# Altium PCB SensorHub.PcbDoc
Units mm, origin at the board's own origin, x right, y up, seen from the top; angles counter-clockwise.
Board outline 51.44 x 47.88 mm, 4 copper layers (Top Layer, Layer 1, Layer 2, Bottom Layer), stack 1.782 mm thick; 53 components, 43 nets, 250 pads, 74 vias.
Unrouted connection lines stored in the file: 83.
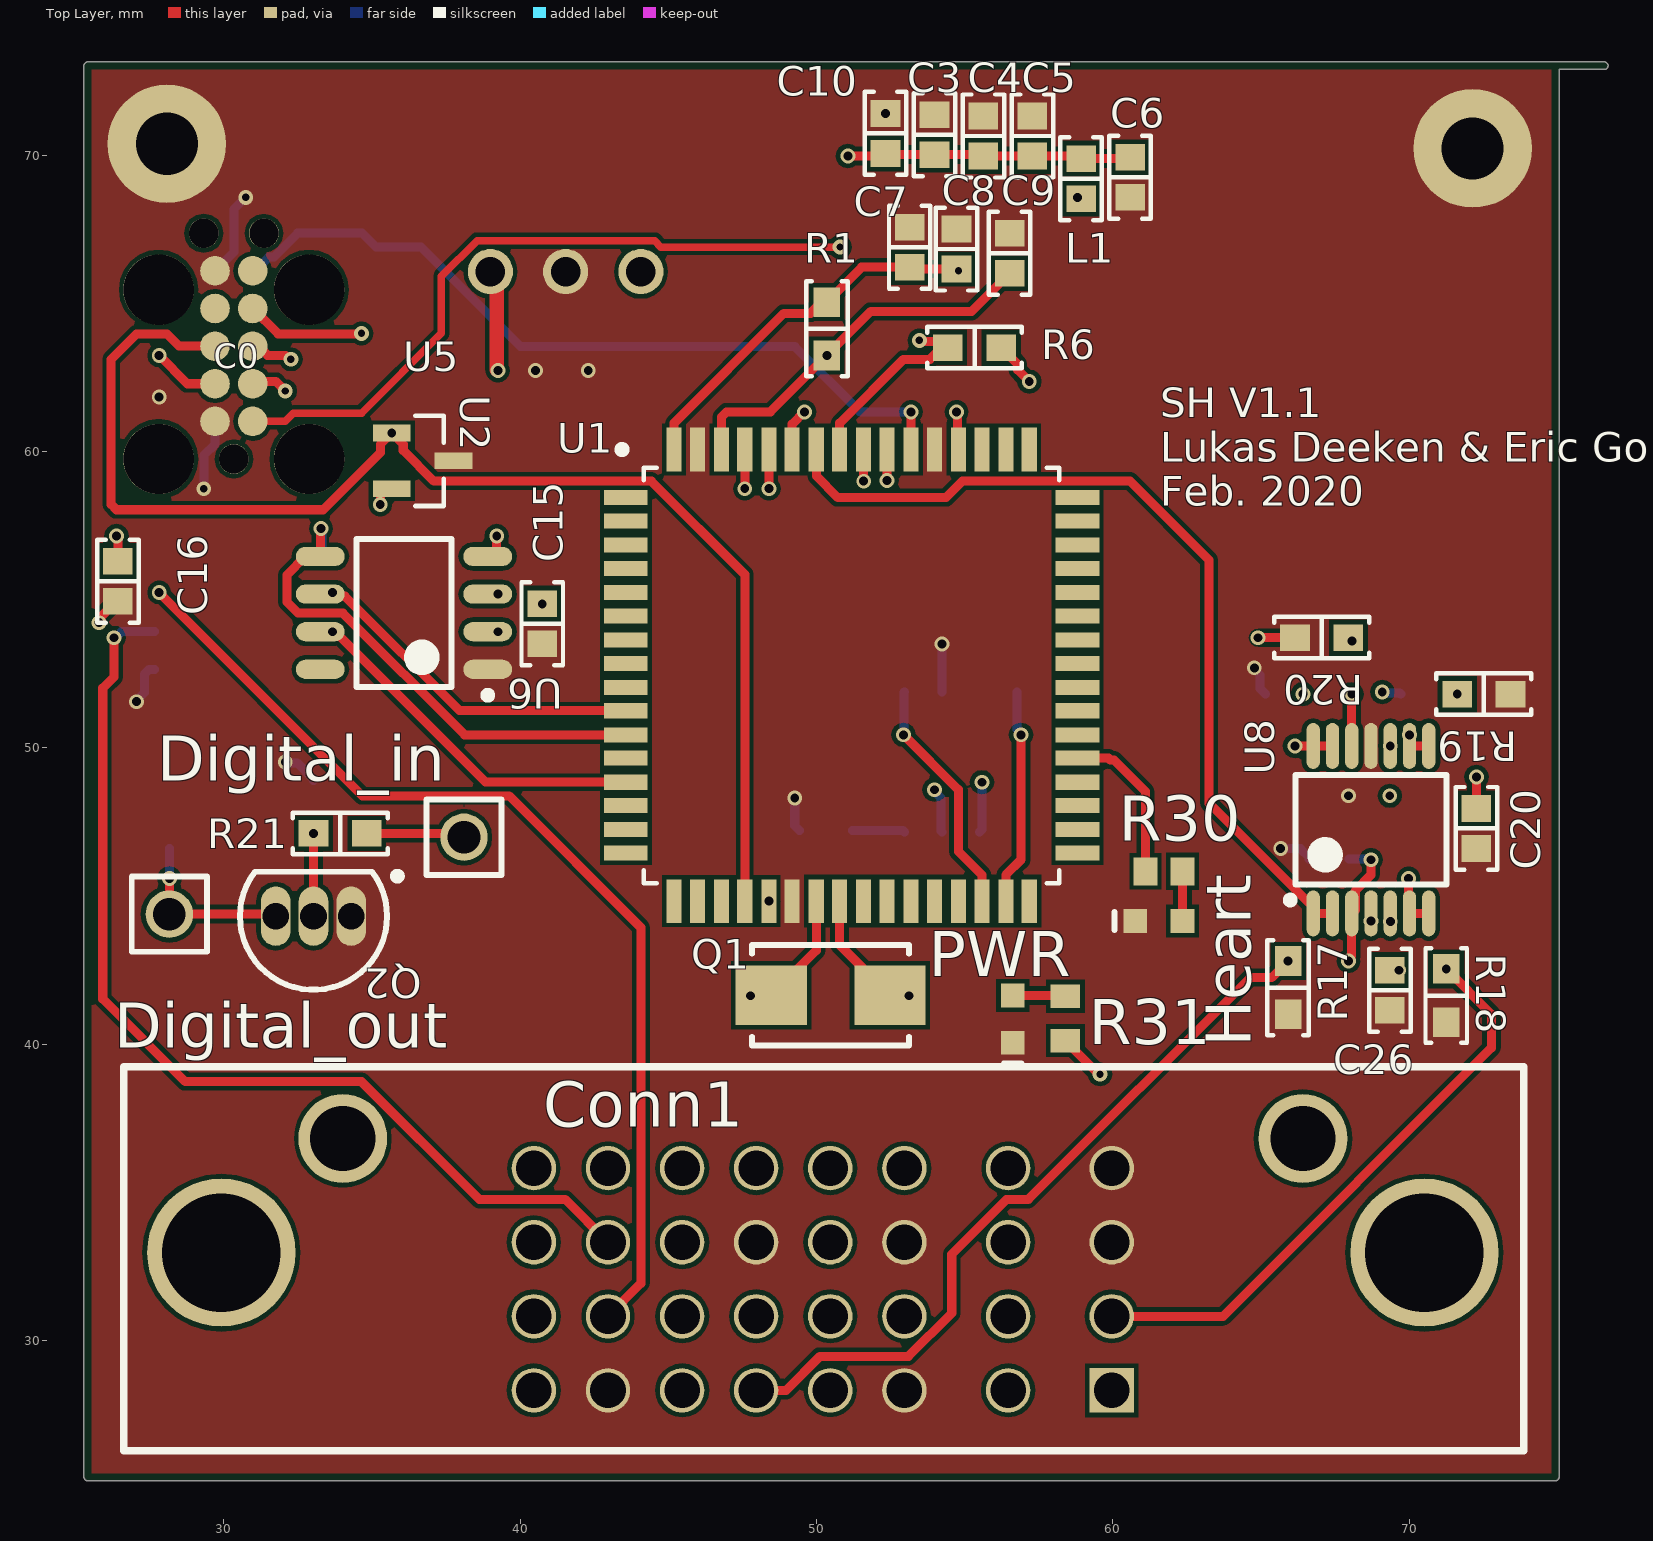
[diagram p0: Top Layer view]
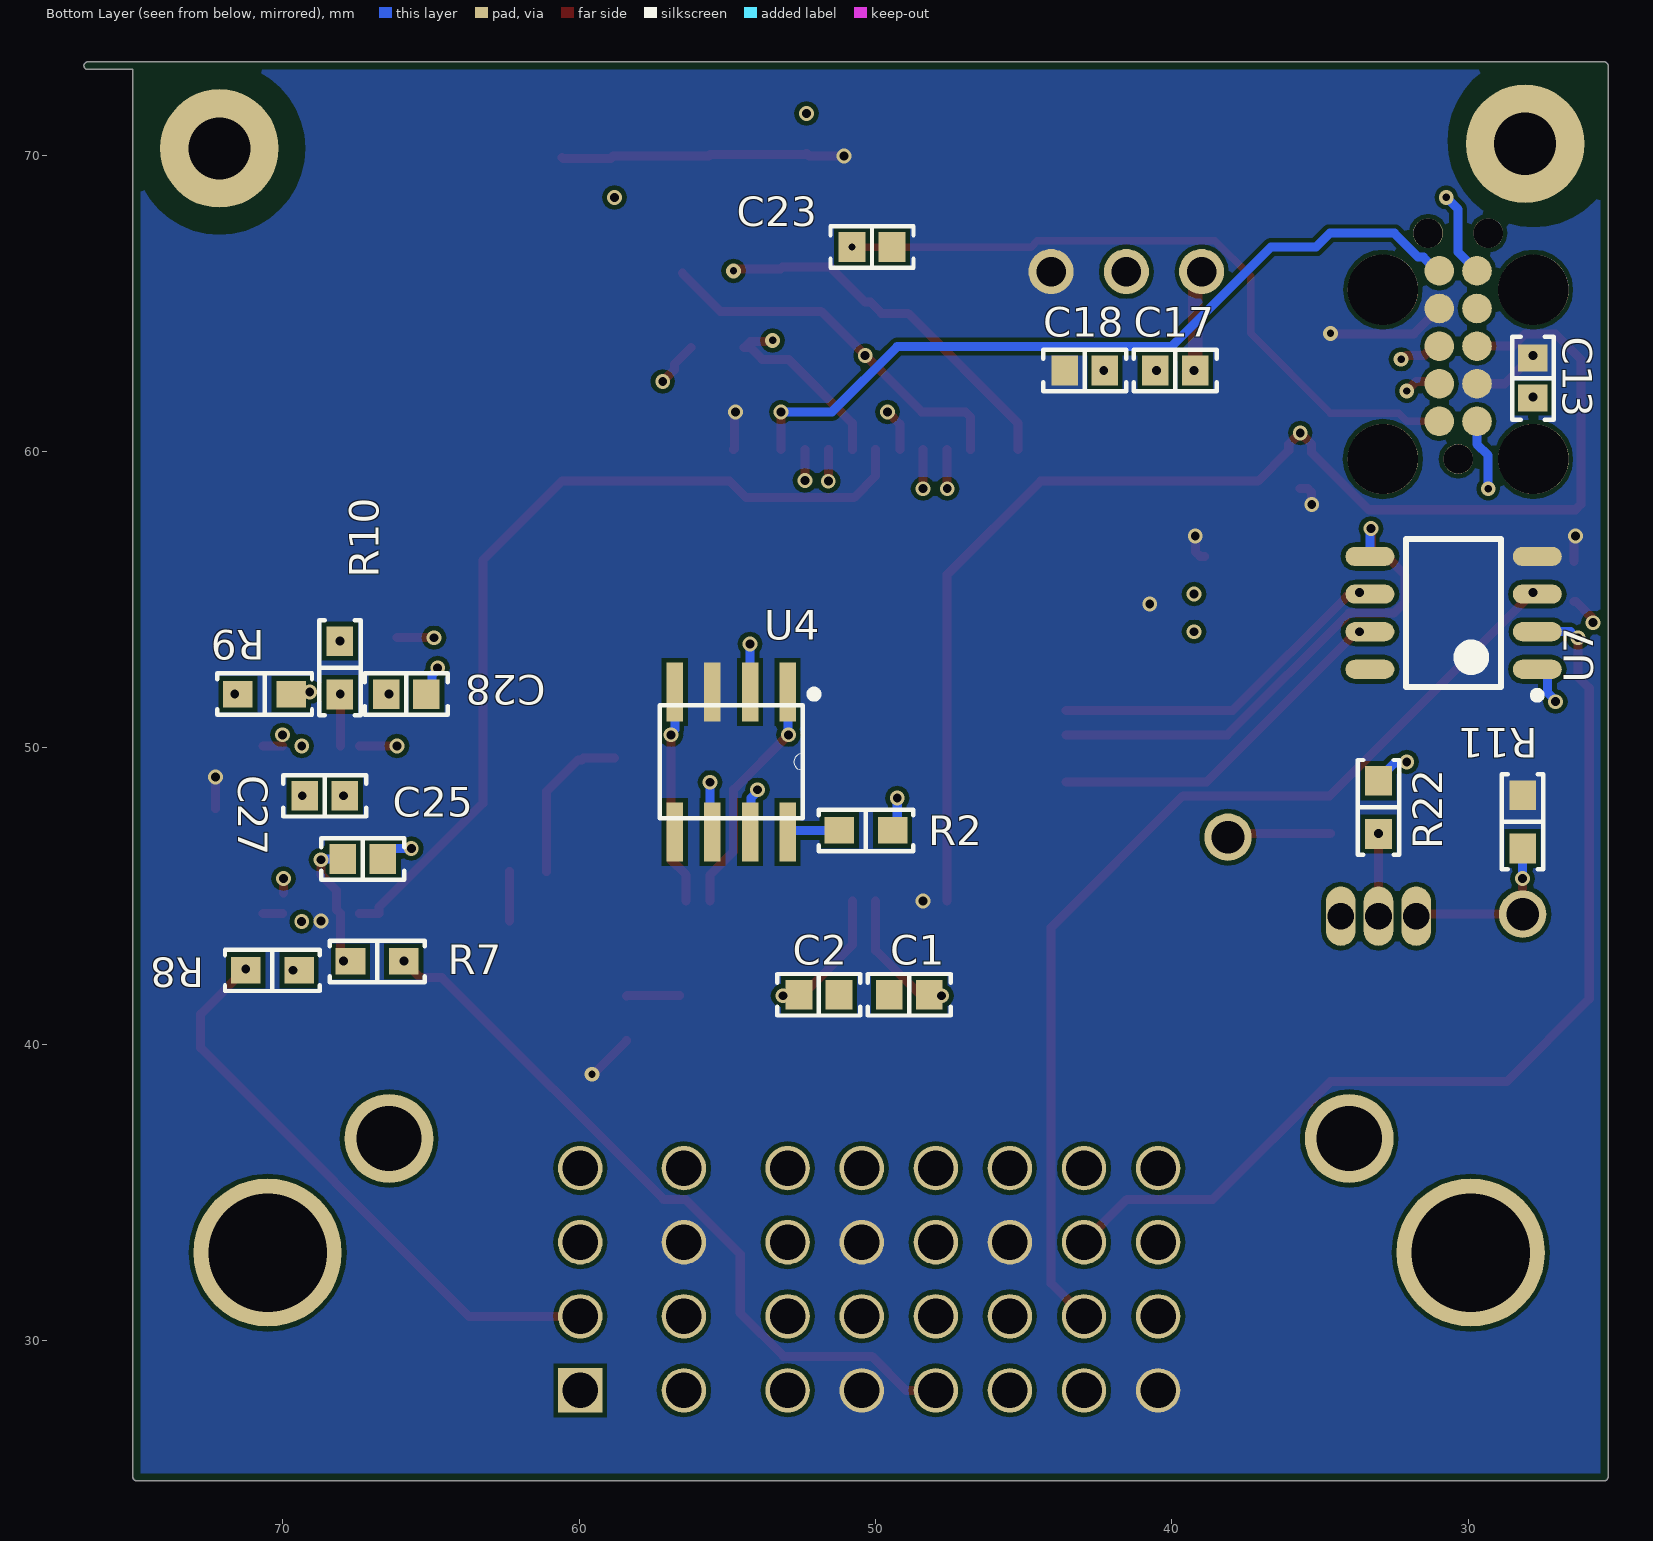
[diagram p1: Bottom Layer view, seen from below]
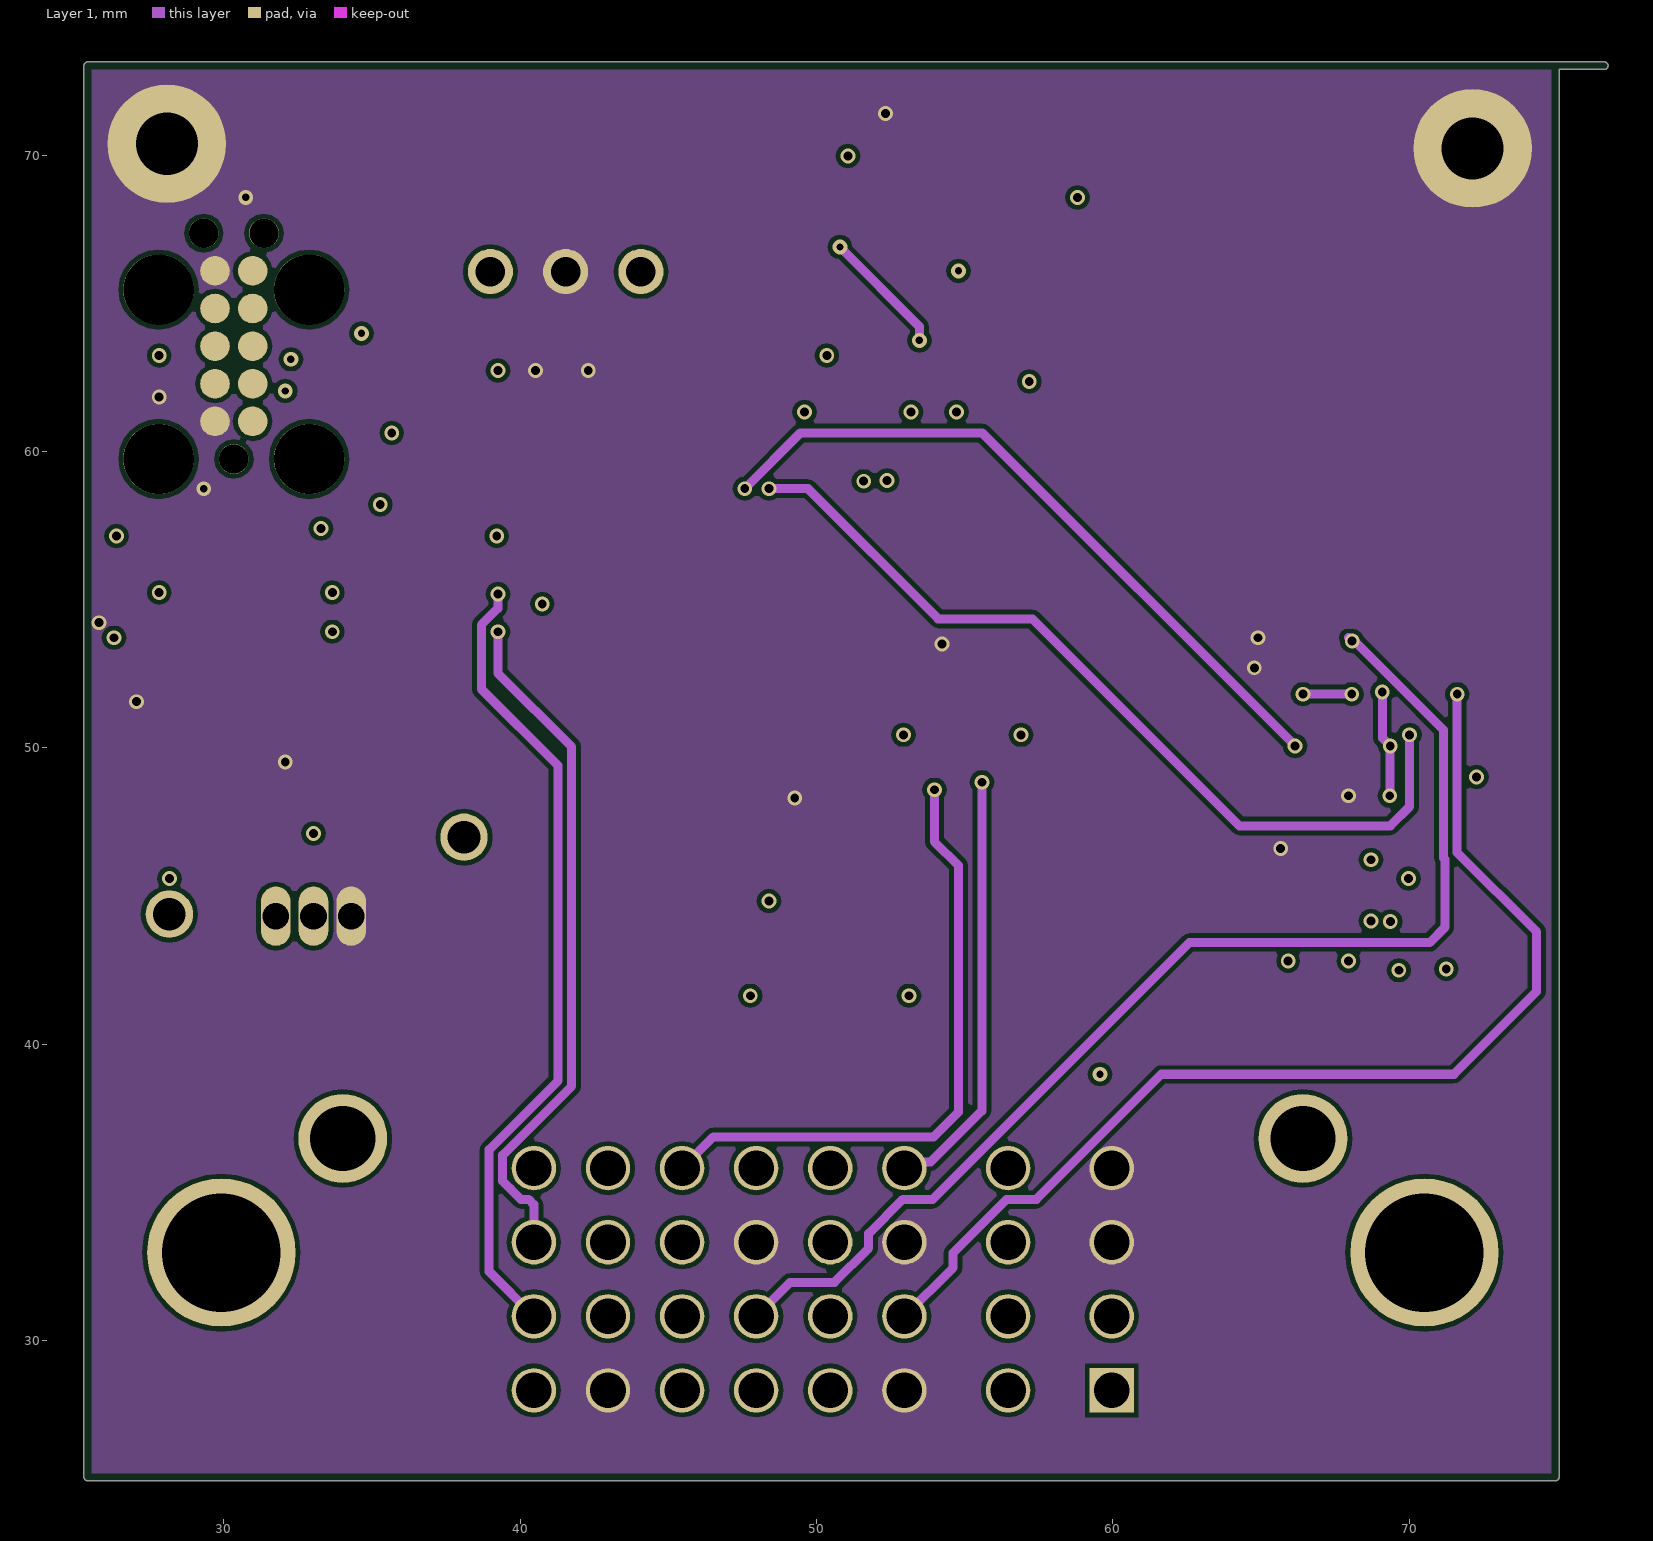
[diagram p2: Layer 1]
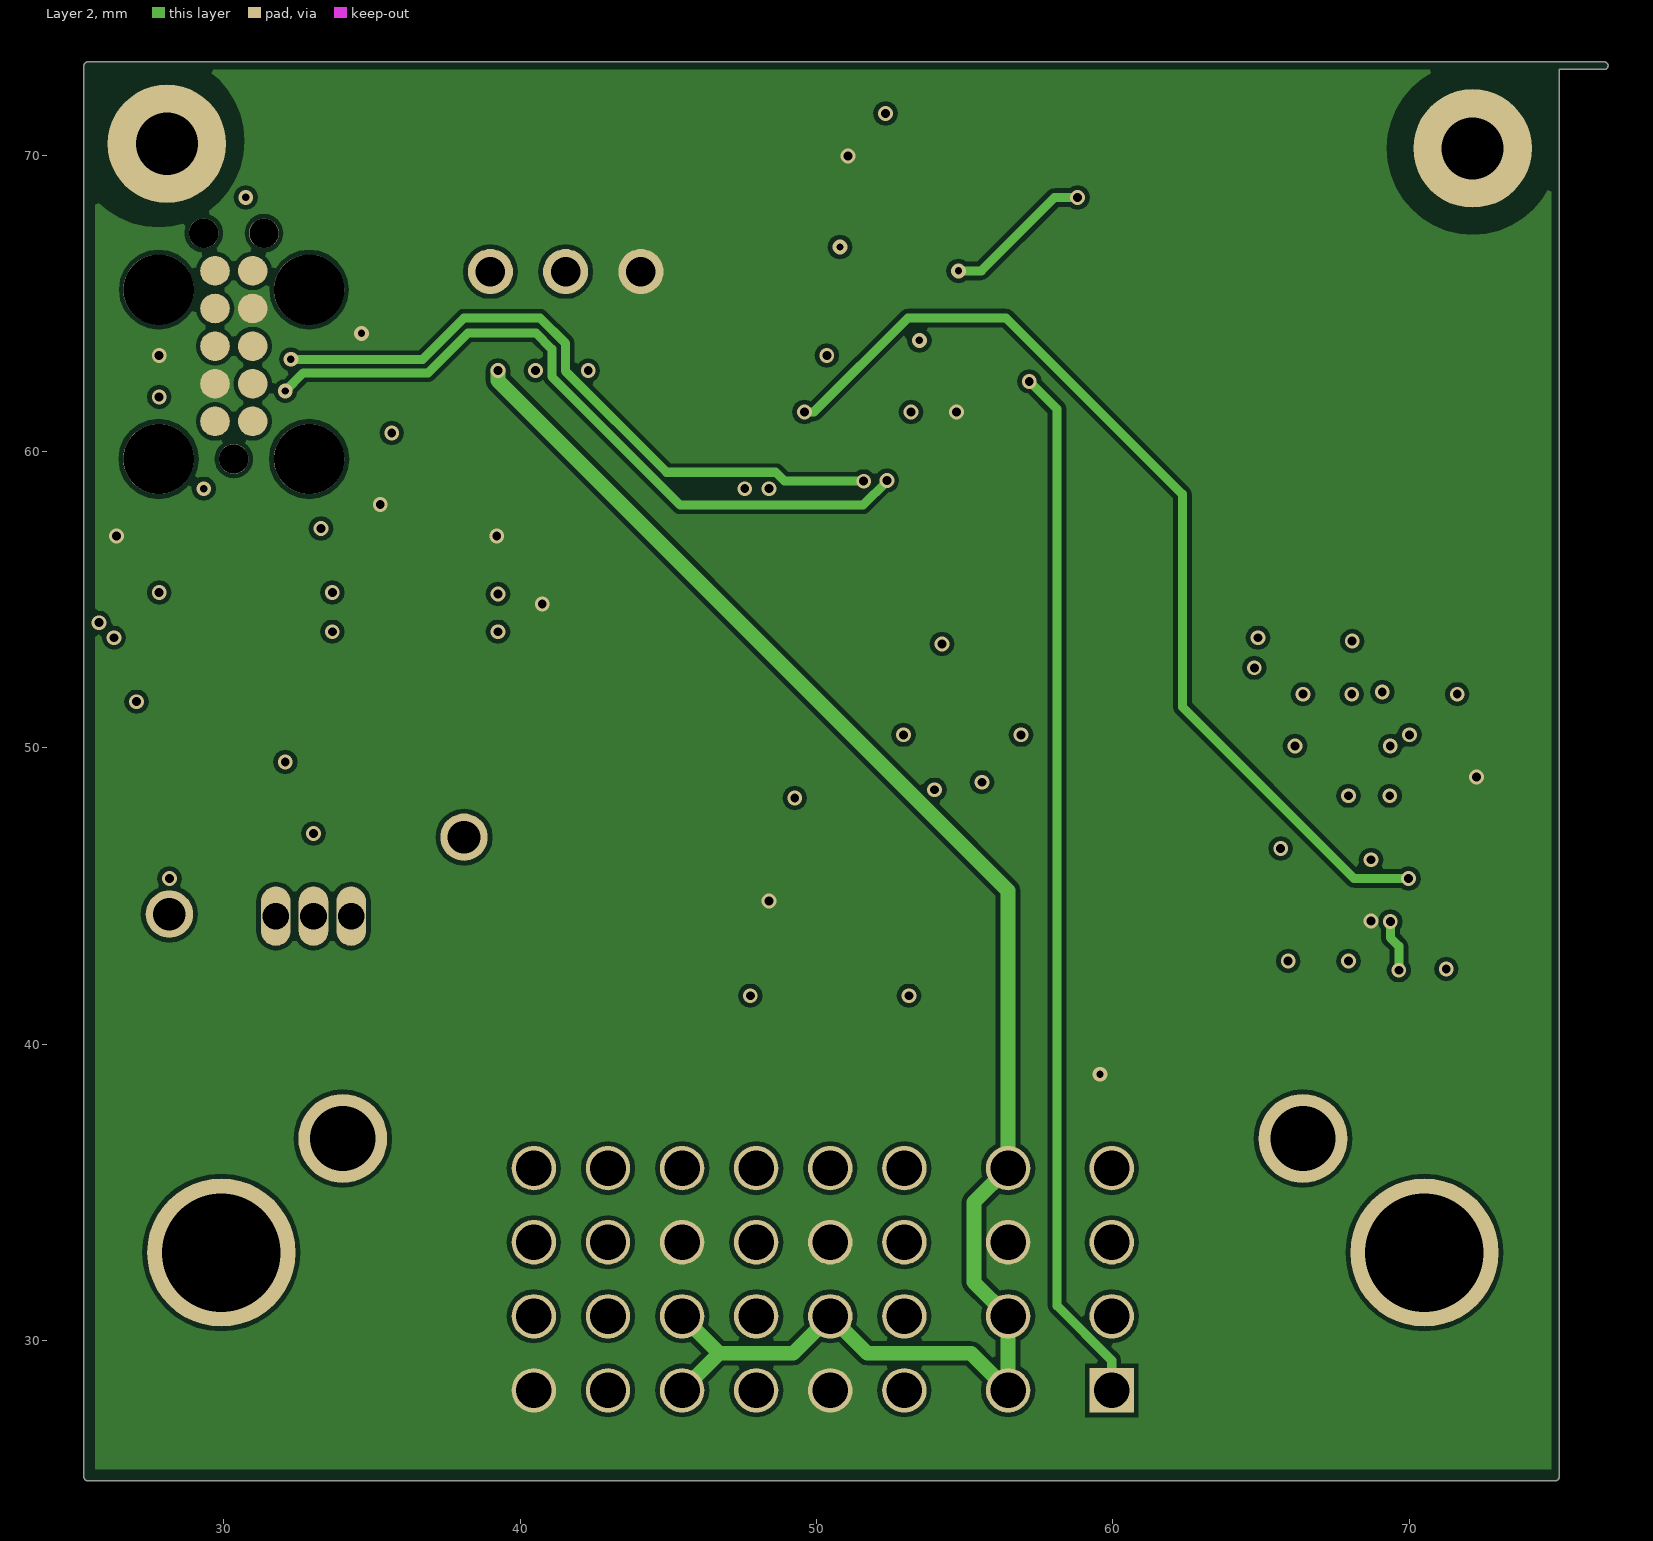
[diagram p3: Layer 2]
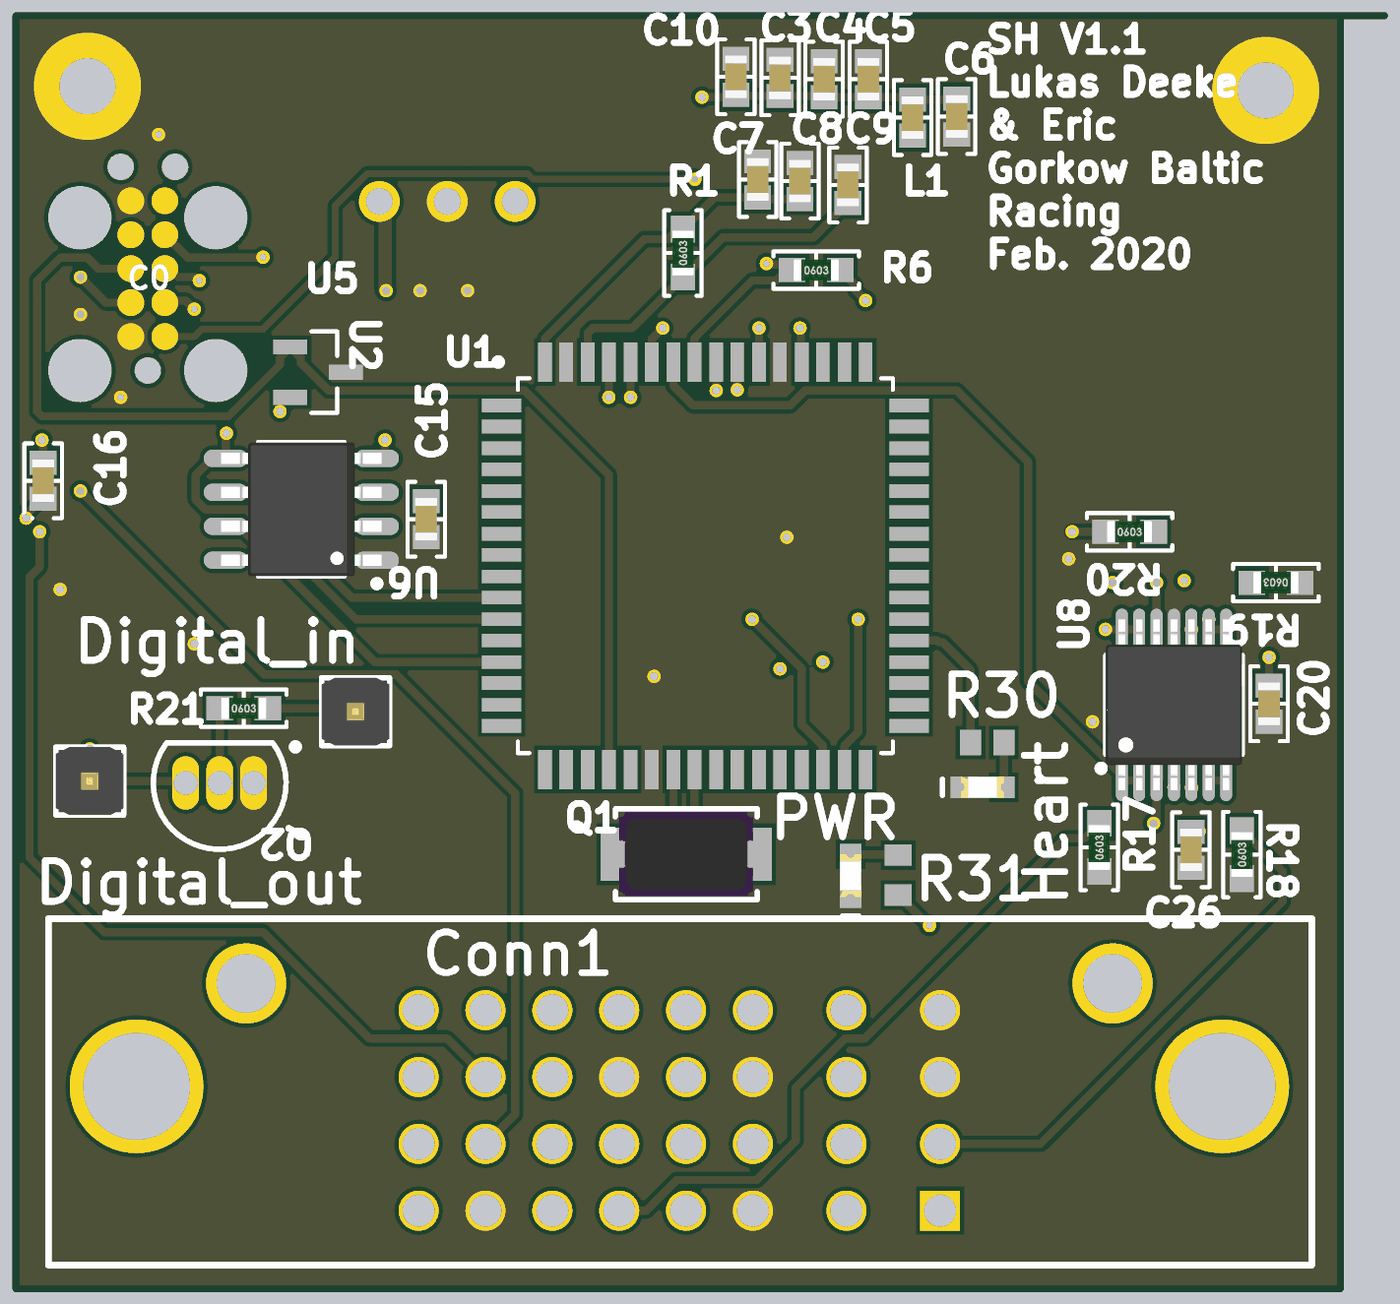
[diagram p4: 3D render of the assembled board from above, using the file's embedded part models]
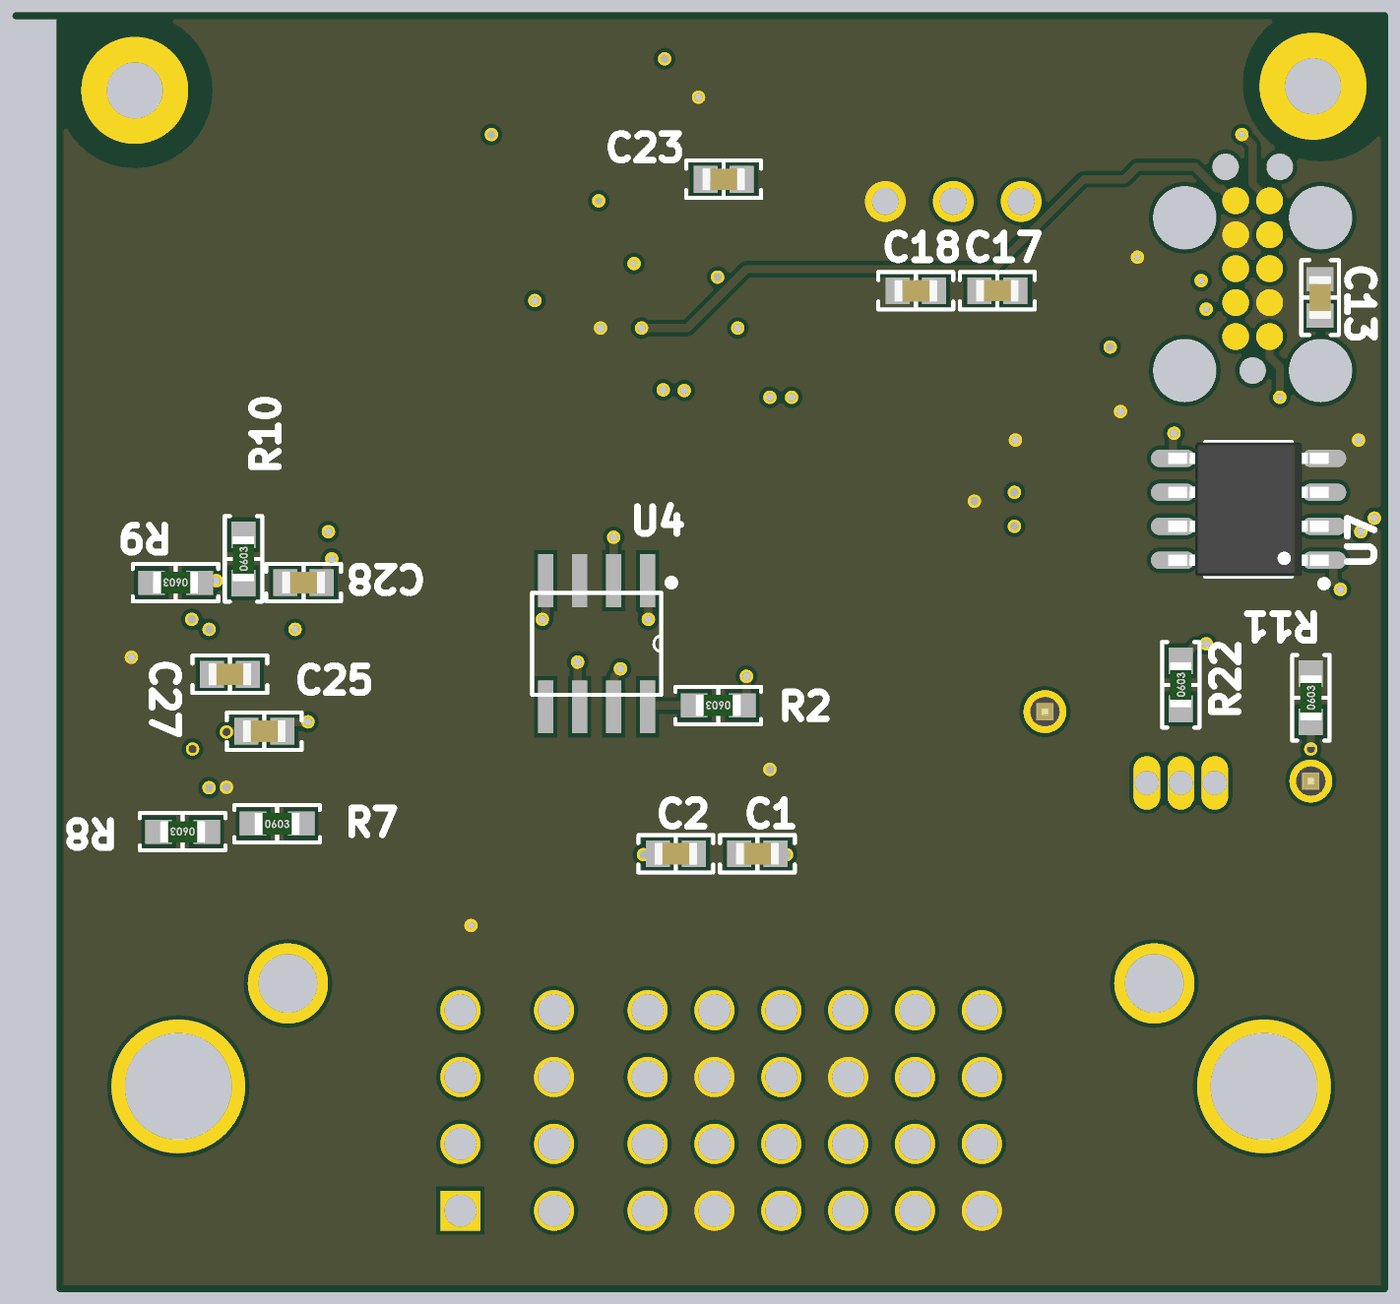
[diagram p5: 3D render of the assembled board from below, using the file's embedded part models]

## Layer stack, top to bottom
Top Solder: solder mask 0.015, Solder Resist, Dk 3.5
Top Layer: signal copper 0.035
Dielectric 2: prepreg 0.0711, PP-006, Dk 4.1
Layer 1: signal copper 0.035
Dielectric 1: dielectric 1.5, FR-4, Dk 4.8
Layer 2: signal copper 0.035
Dielectric 3: prepreg 0.0711, PP-006, Dk 4.1
Bottom Layer: signal copper 0.035
Bottom Solder: solder mask 0.015, Solder Resist, Dk 3.5

## Board outline
25.4,25.273 cw(c25.4,25.4) 25.273,25.4 25.273,73.025 cw(c25.4,73.025) 25.4,73.152 76.581,73.152 cw(c76.581,73.025) 76.708,73.025 cw(c76.581,73.025) 76.581,72.898 75.057,72.898 75.057,25.4 cw(c74.93,25.4) 74.93,25.273

## Design rules (kind name [scope] priority, off if disabled: settings)
AcuteAngle [All] p1: minimum=4.50000000000000E+0001 checktracksonly=FALSE
BoardOutlineClearance [All] p1: gap=0.254 ignorepadtopadclearanceinfootprint=FALSE
Clearance [All] p1: gap=0.152 ignorepadtopadclearanceinfootprint=FALSE
ComponentClearance [All] p1: gap=0.1 collisioncheckmode=3 verticalgap=0.254 showdistances=FALSE
FanoutControl Fanout_Small [All] p1 off: bgadir=Out bgaviamode=Centered fanoutstyle=Auto fanoutdirection=Alternating viagrid=0.025 // Protel DXP Scope 1 Expression Was: (CompPinCount < 5)   Fanout_Small (Default Rule)
FanoutControl Fanout_Default [All] p2: bgadir=Out bgaviamode=Centered fanoutstyle=Auto fanoutdirection=Alternating viagrid=0.025 // Fanout_Default (Default Rule)
FanoutControl Fanout_SOIC [All] p3 off: bgadir=Out bgaviamode=Centered fanoutstyle=Auto fanoutdirection=Alternating viagrid=0.025 // Protel DXP Scope 1 Expression Was: IsSOIC   Fanout_SOIC (Default Rule)
FanoutControl Fanout_BGA [All] p4 off: bgadir=Out bgaviamode=Centered fanoutstyle=Auto fanoutdirection=Alternating viagrid=0.025 // Protel DXP Scope 1 Expression Was: IsBGA   Fanout_BGA (Default Rule)
FanoutControl Fanout_LCC [All] p5 off: bgadir=Out bgaviamode=Centered fanoutstyle=Auto fanoutdirection=Alternating viagrid=0.025 // Protel DXP Scope 1 Expression Was: IsLCC   Fanout_LCC (Default Rule)
HoleSize [All] p1: absolutevalues=TRUE maxlimit=7 minlimit=0.2 maxpercent=80.000 minpercent=20.000
MinimumAnnularRing [All] p1: minimumring=0.17
PolygonConnect PolygonConnect_8 [All vs IsNamedPolygon('+5V_L04_P004')] p1: connectstyle=Direct reliefconductorwidth=0.254 reliefentries=4 polygonreliefangle="90 Angle" airgapwidth=0.254
PolygonConnect PolygonConnect_7 [All vs IsNamedPolygon('+5V_L03_P011')] p2: connectstyle=Direct reliefconductorwidth=0.254 reliefentries=4 polygonreliefangle="90 Angle" airgapwidth=0.254
PolygonConnect PolygonConnect_6 [All vs IsNamedPolygon('GND_L02_P008')] p3: connectstyle=Direct reliefconductorwidth=0.254 reliefentries=4 polygonreliefangle="90 Angle" airgapwidth=0.254
PolygonConnect PolygonConnect_5 [All vs IsNamedPolygon('GND_L01_P009')] p4: connectstyle=Direct reliefconductorwidth=0.254 reliefentries=4 polygonreliefangle="90 Angle" airgapwidth=0.254
PolygonConnect PolygonConnect_4 [All vs IsNamedPolygon('+5V_L04_P004')] p5: connectstyle=Direct reliefconductorwidth=0.254 reliefentries=4 polygonreliefangle="90 Angle" airgapwidth=0.254
PolygonConnect PolygonConnect_3 [All vs IsNamedPolygon('+5V_L03_P003')] p6: connectstyle=Direct reliefconductorwidth=0.254 reliefentries=4 polygonreliefangle="90 Angle" airgapwidth=0.254
PolygonConnect PolygonConnect_2 [All vs IsNamedPolygon('GND_L02_P002')] p7: connectstyle=Direct reliefconductorwidth=0.254 reliefentries=4 polygonreliefangle="90 Angle" airgapwidth=0.254
PolygonConnect PolygonConnect_1 [All vs IsNamedPolygon('GND_L01_P000')] p8: connectstyle=Direct reliefconductorwidth=0.254 reliefentries=4 polygonreliefangle="90 Angle" airgapwidth=0.254
PolygonConnect [All] p9: connectstyle=Relief reliefconductorwidth=0.254 reliefentries=4 polygonreliefangle="90 Angle" airgapwidth=0.254
RoutingVias [All] p1: holewidth=0.3 width=0.64 viastyle="Through Hole" minholewidth=0.3 minwidth=0.61 maxholewidth=0.711 maxwidth=1.27
SMDEntry [All] p1 off: side=TRUE corner=TRUE anyangle=FALSE // Protel DXP Scope 1 Expression Was: not IsRoundPad
SMDToCorner [All] p1: distance=60000
SilkToSolderMaskClearance [All] p1 off: minsilkscreentomaskgap=0.254 clearancetoexposedcopper=TRUE // Protel DXP Scope 1 Expression Was: IsPad
SolderMaskExpansion [All] p1: expansion=0 istentingtop=FALSE
Width [All] p1: maxlimit=1.219 minlimit=0.152 preferedwidth=0.305
22 further rules are at their usual default settings.

## Classes and differential pairs
component class main: C0 C1 C2 C3 C4 C5 C6 C7 C8 C9 C10 C13 C15 C16 C17 C18 Conn1 Digital_in Digital_out Heart L1 PWR Q1 Q2 R1 R2 R11 R21 R22 R30 R31 U1 U2 U4 U5 U6 U7
component class "analog filterung": C20 C23 C25 C26 C27 C28 R6 R7 R8 R9 R10 R17 R18 R19 R20 U8

## Components (designator, comment, footprint, x,y, rotation, side; value= is the part's Value field where it differs from the comment)
C0 "Segger 10Pin needle HEader" "JTAG Needle Header" 30.333,59.751 r90 top
C1 "SMD Capacitor" "CAP 0603/1608" 48.854,41.672 r180 bottom value=18pF
C2 "SMD Capacitor" "CAP 0603/1608" 51.904,41.672 r0 bottom value=18pF
C3 "SMD Capacitor" "CAP 0603/1608" 53.975,70.699 r270 top value=1uF
C4 "SMD Capacitor" "CAP 0603/1608" 55.626,70.652 r270 top value=100nF
C5 "SMD Capacitor" "CAP 0603/1608" 57.277,70.652 r270 top value=1uF
C6 "SMD Capacitor" "CAP 0603/1608" 60.579,69.255 r90 top value=100nF
C7 "SMD Capacitor" "CAP 0603/1608" 53.141,66.9 r90 top value=1uF
C8 "SMD Capacitor" "CAP 0603/1608" 54.72,66.838 r90 top value=100nF
C9 "SMD Capacitor" "CAP 0603/1608" 56.515,66.696 r90 top value=1uF
C10 "SMD Capacitor" "CAP 0603/1608" 52.324,70.739 r90 top value=1uF
C13 "SMD Capacitor" "CAP 0603/1608" 27.813,62.484 r270 bottom value=100nF
C15 "SMD Capacitor" "CAP 0603/1608" 40.74,54.189 r90 top value=100nF
C16 "SMD Capacitor" "CAP 0603/1608" 26.416,55.626 r90 top value=1uF
C17 "SMD Capacitor" "CAP 0603/1608" 39.878,62.738 r180 bottom value=2u2
C18 "SMD Capacitor" "CAP 0603/1608" 42.928,62.738 r0 bottom value=1uF
C20 "SMD Capacitor" "CAP 0603/1608" 72.263,47.284 r270 top value=100nF
C23 "SMD Capacitor" "CAP 0603/1608" 50.113,66.906 r0 bottom value=100nF
C25 "SMD Capacitor" "CAP 0603/1608" 67.295,46.256 r0 bottom value=100nF
C26 "SMD Capacitor" "CAP 0603/1608" 69.342,41.823 r90 top value=100nF
C27 "SMD Capacitor" "CAP 0603/1608" 68.58,48.387 r0 bottom value=100nF
C28 "SMD Capacitor" "CAP 0603/1608" 65.826,51.816 r0 bottom value=100nF
Conn1 "Molex 32Pin CMC Header 643341001" "Molex32Pin CMC Header 643341001" 40.459,28.321 r0 top
Digital_in "61300111121" 61300111121 38.1,46.99 r90 top
Digital_out "61300111121" 61300111121 28.157,44.393 r90 top
Heart "150060BS75000" 0603_A 61.547,44.162 r0 top
L1 "SMD Coil" "CAP 0603/1608" 58.928,69.215 r90 top value=100nH
PWR "150060GS75000" 0603_A 56.614,40.849 r90 top
Q1 "16M" "NDK NX5032GA" 50.47,41.656 r180 top
Q2 "BC514" TO-92A 33.02,44.323 r90 top
R1 "SMD Resistor" "STACKPOLE CSR0603" 50.343,64.146 r90 top value=100
R2 "SMD Resistor" "STACKPOLE CSR0603" 50.317,47.221 r0 bottom value=10k
R6 "SMD Resistor" "STACKPOLE CSR0603" 55.328,63.508 r0 top value=10k
R7 "SMD Resistor" "STACKPOLE CSR0603" 66.813,42.799 r180 bottom value=10k
R8 "SMD Resistor" "STACKPOLE CSR0603" 70.347,42.498 r0 bottom value=10k
R9 "SMD Resistor" "STACKPOLE CSR0603" 70.612,51.816 r0 bottom value=10k
R10 "SMD Resistor" "STACKPOLE CSR0603" 68.072,52.705 r90 bottom value=10k
R11 "SMD Resistor" "STACKPOLE CSR0603" 28.157,47.509 r90 bottom value=1k
R17 "SMD Resistor" "STACKPOLE CSR0603" 65.913,41.91 r90 top
R18 "SMD Resistor" "STACKPOLE CSR0603" 71.247,41.645 r90 top
R19 "SMD Resistor" "STACKPOLE CSR0603" 72.517,51.816 r180 top
R20 "SMD Resistor" "STACKPOLE CSR0603" 67.045,53.721 r0 top
R21 "SMD Resistor" "STACKPOLE CSR0603" 33.92,47.117 r0 top value=4k7
R22 "SMD Resistor" "STACKPOLE CSR0603" 33.02,47.995 r90 bottom value=1k
R30 "CRCW0603130KFKEA" RESC1609X50X30NL10T20 61.722,45.837 r0 top
R31 "RC0603FR-07100RL" RESC1608X55X25ML10T15 58.392,40.875 r90 top
U1 "AT90CAN128-16AI" *QFP80P1600X1600X120-64N 51.181,52.451 r0 top
U2 "MCP130T-450I/TT" *SOT95P237X112-3N 36.703,59.69 r270 top
U4 "MCP2551-I/SN" *SOIC127P600X175-8N 54.864,49.53 r270 bottom
U5 "R-78E05-1.0" SIP3_RECOM 41.529,68.326 r0 top
U6 "MAX31855KASA+" SOIC8 36.074,54.559 r180 top value=Value
U7 "MAX31855KASA+" SOIC8 30.486,54.559 r0 bottom value=Value
U8 "ADA4084-4ARUZ" ANALOG_RU14 68.707,47.244 r90 top

## Footprints (in the part's own frame and the unit in brackets; to place one, negate y for a bottom-side part, rotate by r counter-clockwise, add the part's x,y. Pads: shape width x height; smd on the part's side, far side on the other; paste and mask are expansions set on the pad)
0603_A [mm] "Chip LED, 2-Leads, Body 1.6x0.8mm, IPC Medium Density"
  rect 0.8x0.8 smd: 1(-0.8,0) 2(0.8,0)
  silkscreen extent -1.5,-0.3 -1.5,0.3, body extent -0.8,-0.4 0.8,0.4, height 0.7
61300111121 [mm] "1pins, 1 row, straight, gold plating"
  round 1.6 hole 1.1: 1(0,0)
  silkscreen extent -1.27,-1.27 1.27,1.27, body extent -1.27,-1.27 1.27,1.27, height 8.57
*QFP80P1600X1600X120-64N [mil]
  rect 58x20 smd: 1(-300,236) 2(-300,205) 3(-300,173) 4(-300,142) 5(-300,110) 6(-300,79) 7(-300,47) 8(-300,16) 9(-300,-16) 10(-300,-47) 11(-300,-79) 12(-300,-110) 13(-300,-142) 14(-300,-173) 15(-300,-205) 16(-300,-236) 33(300,-236) 34(300,-205) 35(300,-173) 36(300,-142) 37(300,-110) 38(300,-79) 39(300,-47) 40(300,-16) 41(300,16) 42(300,47) 43(300,79) 44(300,110) 45(300,142) 46(300,173) 47(300,205) 48(300,236)
  rect 20x58 smd: 17(-236,-300) 18(-205,-300) 19(-173,-300) 20(-142,-300) 21(-110,-300) 22(-79,-300) 23(-47,-300) 24(-16,-300) 25(16,-300) 26(47,-300) 27(79,-300) 28(110,-300) 29(142,-300) 30(173,-300) 31(205,-300) 32(236,-300) 49(236,300) 50(205,300) 51(173,300) 52(142,300) 53(110,300) 54(79,300) 55(47,300) 56(16,300) 57(-16,300) 58(-47,300) 59(-79,300) 60(-110,300) 61(-142,300) 62(-173,300) 63(-205,300) 64(-236,300)
  silkscreen extent -310,-276 276,305, body extent -270,-270 270,270, height 30
*SOIC127P600X175-8N [mil]
  rect 78x22 smd: 1(-93,75) 2(-93,25) 3(-93,-25) 4(-93,-75) 5(93,-75) 6(93,-25) 7(93,25) 8(93,75)
  silkscreen extent -95,-95 75,115, body extent -75,-95 75,95, height 80
*SOT95P237X112-3N [mil]
  rect 22x50 smd: 1(-37,-41) 2(37,-41) 3(0,41)
  silkscreen extent -60,-10 60,28, body extent -60,-25 60,25, height 50
ANALOG_RU14 [mm] "Analog Devices 14-Lead Thin Shrink Small Outline Package [TSSOP]"
  oval 1.55x0.45 smd: 1(-2.825,1.95) 2(-2.825,1.3) 3(-2.825,0.65) 4(-2.825,0) 5(-2.825,-0.65) 6(-2.825,-1.3) 7(-2.825,-1.95) 8(2.825,-1.95) 9(2.825,-1.3) 10(2.825,-0.65) 11(2.825,0) 12(2.825,0.65) 13(2.825,1.3) 14(2.825,1.95)
  silkscreen extent -2.5,-2.55 1.85,2.85, body extent -3.2,-2.55 3.2,2.55, height 1.2
"CAP 0603/1608" [mm] "Chip Capacitor, 2-Leads, Body 1.60x0.80mm, IPC Medium Density"
  rect 0.9x1 smd: 1(-0.675,0) 2(0.675,0)
  silkscreen extent -1.4,-0.7 1.4,0.7, body extent -0.8,-0.41 0.8,0.41, height 0.82
"JTAG Needle Header" [mm]
  round 1 all layers, no hole: 1(1.27,-0.635) 2(2.54,-0.635) 3(3.81,-0.635) 4(5.08,-0.635) 5(6.35,-0.635) 6(6.35,0.635) 7(5.08,0.635) 8(3.81,0.635) 9(2.54,0.635) 10(1.27,0.635)
  round 2.375 hole 2.375 unplated: 88(0,2.54) 88(0,-2.54) 88(5.715,-2.54) 88(5.715,2.54)
  round 1 hole 0.991 unplated: 99(0,0) 99(7.62,-1.015) 99(7.62,1.015)
"Molex32Pin CMC Header 643341001" [mm]
  round 1.5 hole 1.2: 1(0,7.5) 2(2.5,7.5) 3(5,7.5) 4(7.5,7.5) 5(10,7.5) 6(12.5,7.5) 7(16,7.5) 8(19.5,7.5) 9(0,5) 10(2.5,5) 11(5,5) 12(7.5,5) 13(10,5) 14(12.5,5) 15(16,5) 16(19.5,5) 17(0,2.5) 18(2.5,2.5) 19(5,2.5) 20(7.5,2.5) 21(10,2.5) 22(12.5,2.5) 23(16,2.5) 24(19.5,2.5) 25(0,0) 26(2.5,0) 27(5,0) 28(7.5,0) 29(10,0) 30(12.5,0) 31(16,0)
  rect 1.5x1.5 hole 1.2: 32(19.5,0)
  round 5 hole 4: 219(-10.55,4.65) 219(30.05,4.65)
  round 3 hole 2.2: 220(-6.45,8.5) 220(25.95,8.5)
  silkscreen extent -13.84,-2.03 33.4,10.92
"NDK NX5032GA" [mm] "Crystal, 2-Leads, Body 5.00x3.20mm, IPC Medium Density"
  rect 2.4x2 smd: 1(-2,0) 2(2,0)
  silkscreen extent -2.65,-1.7 2.65,1.7, body extent -2.5,-1.6 2.5,1.6, height 1.2
RESC1608X55X25ML10T15 [mm] "Chip Resistor, 2-Leads, Body 1.60x0.80mm, IPC Low Density"
  rect 0.8x1 smd: 1(-0.75,0) 2(0.75,0)
  body extent -0.85,-0.45 0.85,0.45, height 0.55
RESC1609X50X30NL10T20 [mm] "Chip Resistor, 2-Leads, Body 1.55x0.85mm, IPC Medium Density"
  rect 0.8x0.95 smd: 1(-0.625,0) 2(0.625,0)
  body extent -0.82,-0.48 0.82,0.48, height 0.5
SIP3_RECOM [mm]
  round 1.524 hole 1: 1(-2.54,-2.25) 2(0,-2.25) 3(2.54,-2.25)
  body extent -5.75,-4.25 5.75,4.25, height 10.4
SOIC8 [mm] "SOIC, 8-Leads, Body 4,90x3,90mm, Pitch 1,27mm, IPC Low Density"
  oval 1.65x0.65 smd: 1(-2.825,1.905) 2(-2.825,0.635) 3(-2.825,-0.635) 4(-2.825,-1.905) 5(2.825,-1.905) 6(2.825,-0.635) 7(2.825,0.635) 8(2.825,1.905)
  silkscreen extent -2.95,-2.5 1.6,2.9, body extent -3,-2.5 3,2.5, height 1.75
"STACKPOLE CSR0603" [mm] "Chip Resistor, 2-Leads, Body 1.60x0.80mm, IPC Medium Density"
  rect 1x0.9 smd: 1(-0.9,0) 2(0.9,0)
  silkscreen extent -1.6,-0.7 1.6,0.7, body extent -0.85,-0.4 0.85,0.4, height 0.45
TO-92A [mm] "TO, Flat Index; 3 In-Line, Axial Leads; Body Dia. 4.5mm; Leads 0.51 x 0.48 mm (max)"
  oval 2x1 hole 0.9: 1(0,-1.27) 2(0,0) 3(0,1.27)
  silkscreen extent -2.48,-2.96 1.5,2.48, body extent -2.48,-2.5 1.5,2.5, height 6.86

## Part data
C1 C2 C3 C4 C5 C6 C7 C8 C9 C10 C13 C15 C16 C17 C18 C20 C23 C25 C26 C27 C28: "Capacitor with multiple Footprints"
Digital_in Digital_out: "WR-PHD 2.54 mm THT Pin Header, 1p", Rated Current="3 A", Withstanding Voltage="500 VAC", Working Voltage="250 VAC", ComponentLink1Description=Manufacturer, ComponentLink1URL=http://www.we-online.de, ComponentLink2Description=Datasheet, ComponentLink2URL=http://katalog.we-online.de/em/datasheet/6130xx11121.pdf, Part Number=61300111121, Pin Number=1, Pitch="2.54 mm", Published Date="Aug 2017", Publisher="Wurth Elektronik"
Heart: library part CMP-1426-00003-1, "SMD mono-color Chip LED, WL-SMCW, Blue", Color=Blue, Manufacturer="Wuerth Elektronik", ComponentLink1Description="Manufacturer URL", ComponentLink1URL=http://www.we-online.com, ComponentLink2Description=Datasheet, ComponentLink2URL=http://katalog.we-online.com/led/datasheet/150060BS75000.pdf, PackageReference=0603_A, PartNumber=150060BS75000
L1: library part "SMD Capacitor", "Capacitor with multiple Footprints"
PWR: library part CMP-1426-00002-1, "SMD mono-color Chip LED, WL-SMCW, Green", Color=Green, Manufacturer="Wuerth Elektronik", ComponentLink1Description="Manufacturer URL", ComponentLink1URL=http://www.we-online.com, ComponentLink2Description=Datasheet, ComponentLink2URL=http://katalog.we-online.com/led/datasheet/150060GS75000.pdf, PackageReference=0603_A, PartNumber=150060GS75000
Q1: library part "16 MHz Quartz", "16 MHz Quartz"
Q2: library part 2N3904, "NPN General Purpose Amplifier", ComponentLink1Description="Manufacturer Link", ComponentLink1URL=http://www.fairchildsemi.com/, ComponentLink2Description=Datasheet, ComponentLink2URL=http://www.fairchildsemi.com/ds/2N%2F2N3904.pdf, DatasheetVersion=1997, LatestRevisionDate=15-Jan-2003, LatestRevisionNote="PCB Footprint 'BCY-W3/D4.7' replaced", PackageDescription="TO, Flat Index; 3 In-Line, Axial Leads; Body Dia. 4.5mm; Leads 0.51 x 0.48 mm (max)", PackageReference=TO-92A, PackageVersion=Sep-1998, Published=8-Jun-2000, Publisher="Altium Limited"
R1 R2 R6 R7 R8 R9 R10 R11 R17 R18 R19 R20 R21 R22: "Resistor with multiple footprints"
R30: library part CMP-2000-03887-1, Manufacturer="Vishay Dale", Part Number=CRCW0603130KFKEA
R31: library part CMP-2100-03663-1, "Chip Resistor, 100 Ohm, +/- 1%, 0.1 W, -55 to 155 degC, 0603 (1608 Metric), RoHS, Tape and Reel", Case Code (Imperial)=0603, Case Code (Metric)=1608, Manufacturer=Yageo, Max Operating Temperature=155degC, Min Operating Temperature=-55degC, Package Description="2-Pin Surface Mount Device, Body 1.6 x 0.8 mm", Power Rating=100mW, Resistance=100Ohm, Temperature Coefficient=100ppm/degreesC, Tolerance=1%, Voltage Rating=50V, Case/Package=0603, Composition=ThickFilm, Datasheet URL=http://www.yageo.com/NewPortal/yageodocoutput?fileName=/pdf/R-Chip/PYu-RC_Group_51_RoHS_L_5.pdf, Datasheet Version="Rev. 5, 10/2016", Depth=0.8mm, Height=0.45mm, Lead Free=LeadFree, Length=1.6mm, Manufacturer URL=http://www.yageo.com/, Military Standard=Not, Number of Pins=2, Package Reference=0603, Packaging=TapeandReel, REACH SVHC=Unknown, RoHSCompliant=true, Termination=SMD/SMT, Voltage Rating (DC)=50V, Width=0.8mm
U1: "Ic Mcu 8bit 128kb Flash 64tqfp", Package="TQFP-64 Microchip", Availability=Unavailable, MF=Microchip, MP=AT90CAN128-16AI, Price=None, SnapEDA_Link=https://www.snapeda.com/parts/AT90CAN128-16AI/Microchip/view-part/?ref=snap
U2: "System Supervisors - Power Supply Monitors with Reset Generators Open Drain Low", Package="SOT-23-3 Microchip", Availability=Unavailable, MF=Microchip, MP=MCP120T-450I/TT, Price=None, SnapEDA_Link=https://www.snapeda.com/parts/MCP120T-450I/TT/Microchip/view-part/?ref=snap
U4: "MCP2551 Series 5.5 V 1 Mb/s Surface Mount High-Speed CAN Transceiver - SOIC-8", Package="SOIC-8 Microchip", Availability=Unavailable, MF=Microchip, MP=MCP2551-I/SN, Price=None, SnapEDA_Link=https://www.snapeda.com/parts/MCP2551-I/SN/Microchip/view-part/?ref=snap
U5: "Nonisolated 5V Switchmode converter"
U6 U7: "No Description Available", Built_By=EMA_UL_Team, Copyright="Copyright (C) 2018 Accelerated Designs. All rights reserved", Manufacturer_Part_Number=MAX31855KASA+, RefDes=RefDes, Type=DEV, Vendor="Maxim Integrated Products"
U8: "30 V, Low Noise, Rail-to-Rail Input/Output, Low Power Operational Amplifiers"

## Free pads (board coordinates)
  round 4 hole 2.1: 2(28.075,70.387) 2(72.136,70.231)

## Via types
v1: diameter 0.5, hole 0.3, Top Layer to Bottom Layer, 65 vias
v2: diameter 0.5, hole 0.25, Top Layer to Bottom Layer, 9 vias

## Nets (pads, with @x,y where several pads share a name; then routed paths per layer and width w, separated by ;. In a path a pad name is that pad's centre, name@x,y a point inside that pad or via, vN(x,y) a via of type N, cw(c..) or ccw(c..) an arc to the next point about the centre after c; other vN are vias at no path point)
+5V: C0.4 C0.9 C3.2 C4.2 C5.2 C6.2 C10.1 C13.1 C15.2 C16.2 C18.2 C20.1 Conn1.11 Conn1.13 Conn1.15 Conn1.25 Conn1.29 L1.2 R11.2 R31.1 U1.21 U1.52 U2.2 U4.3 U5.3 U6.4 U7.4 U8.4 | length 22.6
  Top Layer w0.305: v1(26.372,57.15) 26.372,57.097 26.416,57.053 C16.2 ; v1(27.813,63.246) 28.768,62.291 C0.9 ; C0.4 31.825,63.974 34.621,63.974 v2(34.64,63.992) ; v1(35.274,58.218) 35.274,58.623 35.401,58.75 U2.2 ; U6.4 39.044,56.464 39.203,56.624 v1(39.203,57.15) ; v1(51.054,69.977) 52.237,69.977 C10.1 52.364,70.024 C3.2 55.579,70.024 C4.2 C5.2 58.841,69.977 L1.2 60.539,69.89 C6.2 ; v1(54.72,61.341) 54.754,61.307 54.754,60.105 U1.52 ; R31.1 59.528,38.989 v2(59.563,38.989) ; C20.1 v1(72.263,49.022)
  other v1: 68.707,44.162 48.387,44.831 40.74,54.864
+12V: C17.2 Conn1.7 Conn1.19 Conn1.21 Conn1.23 Conn1.27 Conn1.31 U5.1 | length 60.8
  Top Layer w0.305: U5.1 U5.1@39.206,65.859 ; v1@39.206,62.775 v1(39.243,62.738)
  Top Layer w0.5: v1@39.206,62.775 U5.1@39.206,65.859
  Layer 2 w0.5: v1(39.243,62.738) 39.243,62.401 56.459,45.185 Conn1.7 55.307,34.669 55.307,31.973 Conn1.23 Conn1.31 55.209,29.571 51.709,29.571 Conn1.21 49.209,29.571 46.709,29.571 ; Conn1.27 46.709,29.571 ; Conn1.19 46.709,29.571
GND: C0.6 C0.10 C1.1 C2.1 C3.1 C4.1 C5.1 C6.1 C7.2 C8.2 C9.2 C10.2 C13.2 C15.1 C16.1 C17.1 C18.1 C20.2 C23.1 C25.1 C26.1 C27.1 C28.1 Conn1.8 Conn1.12 Conn1.14 Conn1.16 Conn1.26 Conn1.30 Heart.1 pad.2 PWR.1 Q2.1 R2.1 R17.1 R18.1 R19.1 R20.1 R22.2 U1.22 U1.53 U1.63 U2.3 U4.2 U5.2 U6.1 U7.1 U8.11 | length 15.3
  Top Layer w0.305: v1(25.781,54.229) 25.818,54.266 25.818,54.403 26.366,54.951 C16.1 ; v1(64.897,53.721) R20.1
  Bottom Layer w0.305: v1(27.051,51.562) 27.051,51.606 27.313,51.869 27.313,52.495 27.473,52.654 U7.1 ; v2(29.318,58.75) 29.318,59.874 29.698,60.254 C0.10 ; C0.6 30.333,66.736 30.333,68.179 v2(30.734,68.58) ; v1(32.068,49.53) 32.104,49.495 32.47,49.495 33.02,48.945 R22.2 ; v1(49.261,48.311) 49.261,47.376 R2.1 ; U4.2 v1(54.229,53.514) ; v1(64.77,52.705) 64.77,52.652 64.954,52.468 64.954,52.013 C28.1 ; v1(65.659,46.609) 65.665,46.603 66.322,46.603 66.62,46.306 C25.1
  other v1: 67.945,48.387 27.813,61.849 40.513,62.738 42.291,62.738 52.324,71.414
NetC0_1: C0.1 C23.2 R6.1 U1.57 | length 34.5
  Top Layer w0.254: C0.1 32.068,61.021 32.341,61.294 34.64,61.294 37.338,63.992 37.338,65.913 38.542,67.117 44.534,67.117 44.745,66.906 v2(50.788,66.906)
  Top Layer w0.305: U1.57 50.775,60.96 52.931,63.117 53.82,63.117 54.212,63.508 R6.1 54.22,63.717 53.504,63.717 v2(53.467,63.754)
  Layer 1 w0.305: v2@50.775,66.916 53.467,64.224 v2(53.467,63.754)
NetC0_2: C0.2 U1.55 | length 26.9
  Top Layer w0.305: C0.2@30.861,62.238 30.992,62.369 31.746,62.369 v2(32.068,62.047) ; v1(52.375,59.03) U1.55
  Layer 2 w0.305: v2(32.068,62.047) 32.68,62.66 36.89,62.66 38.239,64.008 40.521,64.008 41.068,63.462 41.068,62.53 45.402,58.195 51.563,58.195 52.375,59.007 v1(52.375,59.03)
NetC0_3: C0.3 U1.56 | length 25.5
  Top Layer w0.305: C0.3@30.966,63.614 31.103,63.614 31.471,63.246 32.076,63.246 32.205,63.117 v2(32.258,63.117) ; v1(51.587,59.004) U1.56
  Layer 2 w0.305: C0.3 C0.3@31.073,63.667 ; v2(32.258,63.117) 36.701,63.117 38.1,64.516 40.66,64.516 41.525,63.651 41.525,62.719 44.939,59.305 48.617,59.305 48.918,59.004 v1(51.587,59.004)
NetC0_5: C0.5 U1.54 | length 26.5
  Top Layer w0.305: U1.54 v1(53.188,61.341)
  Bottom Layer w0.305: C0.5@30.988,66.048 31.506,66.567 31.681,66.567 32.486,67.371 34.665,67.371 35.13,66.906 36.651,66.906 40.014,63.543 49.261,63.543 51.463,61.341 v1(53.188,61.341)
NetC0_8: C0.8 U1.20 U2.1 | length 44.8
  Top Layer w0.305: C0.8@29.591,63.41 C0.8@29.591,63.508 ; C0.8 28.487,63.561 28.075,63.974 27.052,63.974 26.194,63.115 26.194,58.218 26.372,58.039 33.344,58.039 35.274,59.969 35.274,60.243 v1(35.662,60.63) 36.049,60.243 36.049,60.04 37.085,59.004 44.424,59.004 47.574,55.854 U1.20
NetC1_2: C1.2 Q1.2 U1.23 | length 3.8
  Top Layer w0.305: Q1.2 49.987,43.173 U1.23
  other v1: 47.761,41.64
NetC2_2: C2.2 Q1.1 U1.24 | length 3.9
  Top Layer w0.305: U1.24 50.775,43.351 Q1.1
  other v1: 53.111,41.64
NetC9_1: C9.1 R1.1 U1.62 | length 12.8
  Top Layer w0.305: U1.62 46.787,61.162 46.965,61.341 48.438,61.341 v1(50.343,63.246) 51.832,64.735 55.229,64.735 C9.1
NetC25_2: C25.2 R7.1 U8.3 | length 4.5
  Top Layer w0.305: v1(67.945,42.81) 67.945,42.863 68.057,42.975 U8.3 68.177,44.539 68.177,45.188 68.707,45.718 v1(68.707,46.228)
  Bottom Layer w0.305: C25.2 68.679,46.256 v1(68.707,46.228)
NetC26_2: C26.2 R8.1 U8.5 | length 1.8
  Layer 2 w0.305: v1(69.359,44.144) 69.359,43.601 69.647,43.313 v1(69.647,42.498)
NetC27_2: C27.2 R9.1 U8.10 | length 4.3
  Layer 1 w0.305: v1(69.088,51.892) 69.088,50.338 v1(69.357,50.069) 69.349,50.061 69.349,48.394 v1(69.342,48.387)
  Bottom Layer w0.305: v1(69.088,51.892) 69.125,51.855 69.673,51.855 R9.1
NetC28_2: C28.2 R10.1 U8.12 | length 3.4
  Top Layer w0.305: U8.12 v1(68.057,51.816)
  Layer 1 w0.305: v1(66.409,51.816) v1(68.057,51.816)
NetConn1_1: Conn1.1 Conn1.2 Conn1.3 U4.7 | length 22.9
  Layer 1 w0.305: Conn1.3 46.514,36.876 53.945,36.876 54.788,37.719 54.788,46.028 53.975,46.841 v1(53.975,48.592)
  Bottom Layer w0.305: v1(53.975,48.592) 53.975,48.539 54.203,48.311 54.203,47.193 U4.7
NetConn1_4: Conn1.4 Conn1.5 Conn1.6 U4.6 | length 16.2
  Layer 1 w0.305: Conn1.6 53.167,36.029 53.849,36.029 55.575,37.756 v1(55.575,48.844)
  Bottom Layer w0.305: U4.6 55.575,47.244 v1(55.575,48.844)
NetConn1_9: Conn1.9 U6.2 | length 23.2
  Layer 1 w0.305: v1(39.243,53.924) 39.243,52.527 41.732,50.038 41.732,38.586 39.404,36.258 39.404,35.384 39.662,35.126 39.7,35.088 40.022,34.766 40.28,34.766 40.459,34.588 Conn1.9
NetConn1_10: Conn1.10 U7.2 | length 34.3
  Top Layer w0.305: v1(26.289,53.721) 26.289,52.4 25.908,52.019 25.908,41.53 28.696,38.743 34.64,38.743 38.616,34.766 41.514,34.766 Conn1.10
  Bottom Layer w0.305: v1(26.289,53.721) 26.342,53.721 26.545,53.924 U7.2
NetConn1_17: Conn1.17 U6.3 | length 27.3
  Layer 1 w0.305: v1(39.243,55.194) 39.243,54.709 38.688,54.154 38.688,51.99 41.275,49.403 41.275,38.775 38.947,36.447 38.947,32.333 Conn1.17
NetConn1_18: Conn1.18 U7.3 | length 34.5
  Top Layer w0.305: v1(27.813,55.245) 34.671,48.387 39.624,48.387 44.069,43.942 44.069,31.931 Conn1.18
NetConn1_20: Conn1.20 R10.2 R20.2 | length 40.2
  Layer 1 w0.305: Conn1.20 49.105,31.967 50.597,31.967 51.755,33.125 51.755,33.608 52.912,34.766 53.912,34.766 62.58,43.434 70.687,43.434 71.212,43.958 71.212,46.229 71.16,46.281 71.16,50.605 68.16,53.605 v1(68.072,53.605) 68.061,53.605 v1@67.945,53.721
NetConn1_22: Conn1.22 R9.2 R19.2 | length 37.3
  Layer 1 w0.305: Conn1.22 54.605,32.467 54.605,32.959 56.412,34.766 57.412,34.766 61.635,38.989 71.501,38.989 74.296,41.784 74.296,43.792 71.617,46.47 v1(71.617,51.816)
NetConn1_24: Conn1.24 R8.2 R18.2 | length 19.9
  Top Layer w0.305: Conn1.24 63.714,30.821 72.771,39.878 72.771,41.021 v1(71.247,42.545)
NetConn1_28: Conn1.28 R7.2 R17.2 | length 25.1
  Top Layer w0.305: Conn1.28 48.967,28.321 50.113,29.467 53.097,29.467 54.559,30.93 54.559,32.913 56.412,34.766 57.141,34.766 64.627,42.252 65.355,42.252 v1(65.913,42.81)
NetConn1_32: Conn1.32 R6.2 | length 36.7
  Top Layer w0.305: R6.2 56.786,62.951 56.786,62.759 v1(57.175,62.369)
  Layer 2 w0.305: v1(57.175,62.369) 58.112,61.432 58.112,31.176 59.959,29.329 Conn1.32
NetDigital_in_1: Digital_in.1 R21.2 | length 3.5
  Top Layer w0.305: R21.2@34.648,47.117 37.973,47.117 Digital_in.1
NetDigital_out_1: Digital_out.1 Q2.3 R11.1 | length 5.8
  Top Layer w0.305: v1(28.157,45.593) Digital_out.1 31.68,44.393 Q2.3
  Bottom Layer w0.305: v1(28.157,45.593) R11.1
NetHeart_2: Heart.2 R30.2 | length 1.7
  Top Layer w0.305: Heart.2 R30.2
NetPWR_2: PWR.2 R31.2 | length 1.8
  Top Layer w0.305: PWR.2 58.368,41.649 R31.2
NetQ2_2: Q2.2 R21.1 R22.1 | length 2.8
  Top Layer w0.305: Q2.2 v1(33.02,47.117)
NetR2_2: R2.2 U4.8 | length 1.8
  Bottom Layer w0.305: R2.2 52.906,47.221 U4.8
NetR30_1: R30.1 U1.37 | length 5.5
  Top Layer w0.305: U1.37 59.852,49.657 59.915,49.593 60.041,49.593 61.097,48.538 R30.1
NetU1_10: U1.10 U6.6 U7.6 | length 11.9
  Top Layer w0.305: U6.6 33.749,55.194 33.815,55.128 34.082,55.128 37.953,51.257 U1.10
  other v1: 33.655,55.245
NetU1_11: U1.11 U6.5 U7.5 | length 17.5
  Top Layer w0.305: v1(33.274,57.404) 33.249,57.379 U6.5 32.749,56.464 32.119,55.834 32.119,54.933 32.499,54.554 34.01,54.554 38.119,50.444 U1.11
  Bottom Layer w0.305: v1(33.274,57.404) 33.311,57.367 U7.5
NetU1_13: U1.13 U6.7 U7.7 | length 12.4
  Top Layer w0.305: U6.7 v1(33.655,53.924) 33.749,53.924 38.829,48.844 U1.13
NetU1_30: U1.30 U4.1 | length 8.2
  Top Layer w0.305: v1(52.931,50.444) 54.784,48.592 54.784,46.511 55.575,45.72 U1.30
  Bottom Layer w0.305: v1(52.931,50.444) 52.945,50.458 52.945,51.878 U4.1
NetU1_31: U1.31 U4.4 | length 7.3
  Top Layer w0.305: U1.31 56.388,45.72 56.896,46.228 v1(56.896,50.444)
  Bottom Layer w0.305: U4.4 56.769,50.624 56.896,50.497 v1(56.896,50.444)
NetU1_58: U1.58 U8.1 U8.2 | length 29.8
  Top Layer w0.305: U1.58 49.987,59.182 50.72,58.449 54.36,58.449 54.915,59.004 60.579,59.004 63.246,56.337 63.246,48.133 66.757,44.622 U8.1 U8.2
NetU1_59: U1.59 U8.6 U8.7 | length 36.3
  Top Layer w0.305: U1.59 49.174,60.928 v1(49.587,61.341) ; U8.6@69.977,45.099 v1(69.977,45.593) ; U8.6 U8.7
  Layer 2 w0.305: v1(49.587,61.341) 49.911,61.341 53.086,64.516 56.388,64.516 62.34,58.564 62.34,51.389 68.136,45.593 v1(69.977,45.593)
NetU1_60: U1.60 U8.8 U8.9 | length 31
  Top Layer w0.305: v1(48.387,58.75) U1.60 ; U8.9 U8.8
  Layer 1 w0.305: v1(48.387,58.75) 49.708,58.75 54.102,54.356 57.277,54.356 64.263,47.37 69.357,47.37 70.007,48.02 v1(70.007,50.444)
NetU1_61: U1.61 U8.13 U8.14 | length 26.3
  Top Layer w0.305: v1(47.574,58.75) U1.61 ; v1(66.145,50.069) U8.13
  Layer 1 w0.305: v1(47.574,58.75) 49.454,60.63 55.584,60.63 v1(66.145,50.069)
VDDA: C7.1 C8.1 L1.1 R1.2 U1.64 | length 17.7
  Top Layer w0.305: U1.64 45.187,60.96 48.896,64.669 49.785,64.669 50.162,65.046 R1.2 51.521,66.225 C7.1 53.202,66.163 C8.1
  Layer 2 w0.305: v2(54.788,66.101) 55.555,66.101 58.034,68.58 v1(58.801,68.58)
pads on no net: C0.7 C0.88 C0.99 Conn1.219 Conn1.220 U1.1 U1.2 U1.3 U1.4 U1.5 U1.6 U1.7 U1.8 U1.9 U1.12 U1.14 U1.15 U1.16 U1.17 U1.18 U1.19 U1.25 U1.26 U1.27 U1.28 U1.29 U1.32 U1.33 U1.34 U1.35 U1.36 U1.38 U1.39 U1.40 U1.41 U1.42 U1.43 U1.44 U1.45 U1.46 U1.47 U1.48 U1.49 U1.50 U1.51 U4.5 U6.8 U7.8

## Polygon pours and split planes (outlines as drawn)
+5V on Bottom Layer "+5V_L04_P004" (solid, pour order 4): 25.424,25.458 75.589,25.458 75.589,73.21 25.424,73.21
GND on Layer 1 "GND_L02_P008" (solid, pour order 8): 25.461,25.458 75.626,25.458 75.626,73.21 25.461,73.21
+5V on Layer 2 "+5V_L03_P011" (solid, pour order 11): 25.654,73.152 75.565,73.152 75.565,25.654 25.654,25.654
GND on Top Layer "GND_L01_P009" (solid, pour order 9): 25.461,25.458 75.626,25.458 75.626,73.21 25.461,73.21

## Silkscreen, mask and mechanical layers (free items; w line width, h text height)
Top Overlay:
  text "SH V1.1 / Lukas Deeken & Eric Gorkow Baltic Racing / Feb. 2020" at 61.595,58.166 h1
Board Outline:
  lines w0.254: 74.93,73.025 74.93,25.4 25.4,25.4 25.4,73.025 76.581,73.025